# Altium PCB FPv1.3.1.PcbDoc (part 3 of 4)
Units mm, origin at the board's own origin, x right, y up, seen from the top; angles counter-clockwise.
Board outline 81.28 x 53.34 mm, 4 copper layers (Top Layer, GROUND PLANE, POWER PLANE, Bottom Layer); 98 components, 183 nets, 614 pads, 312 vias.
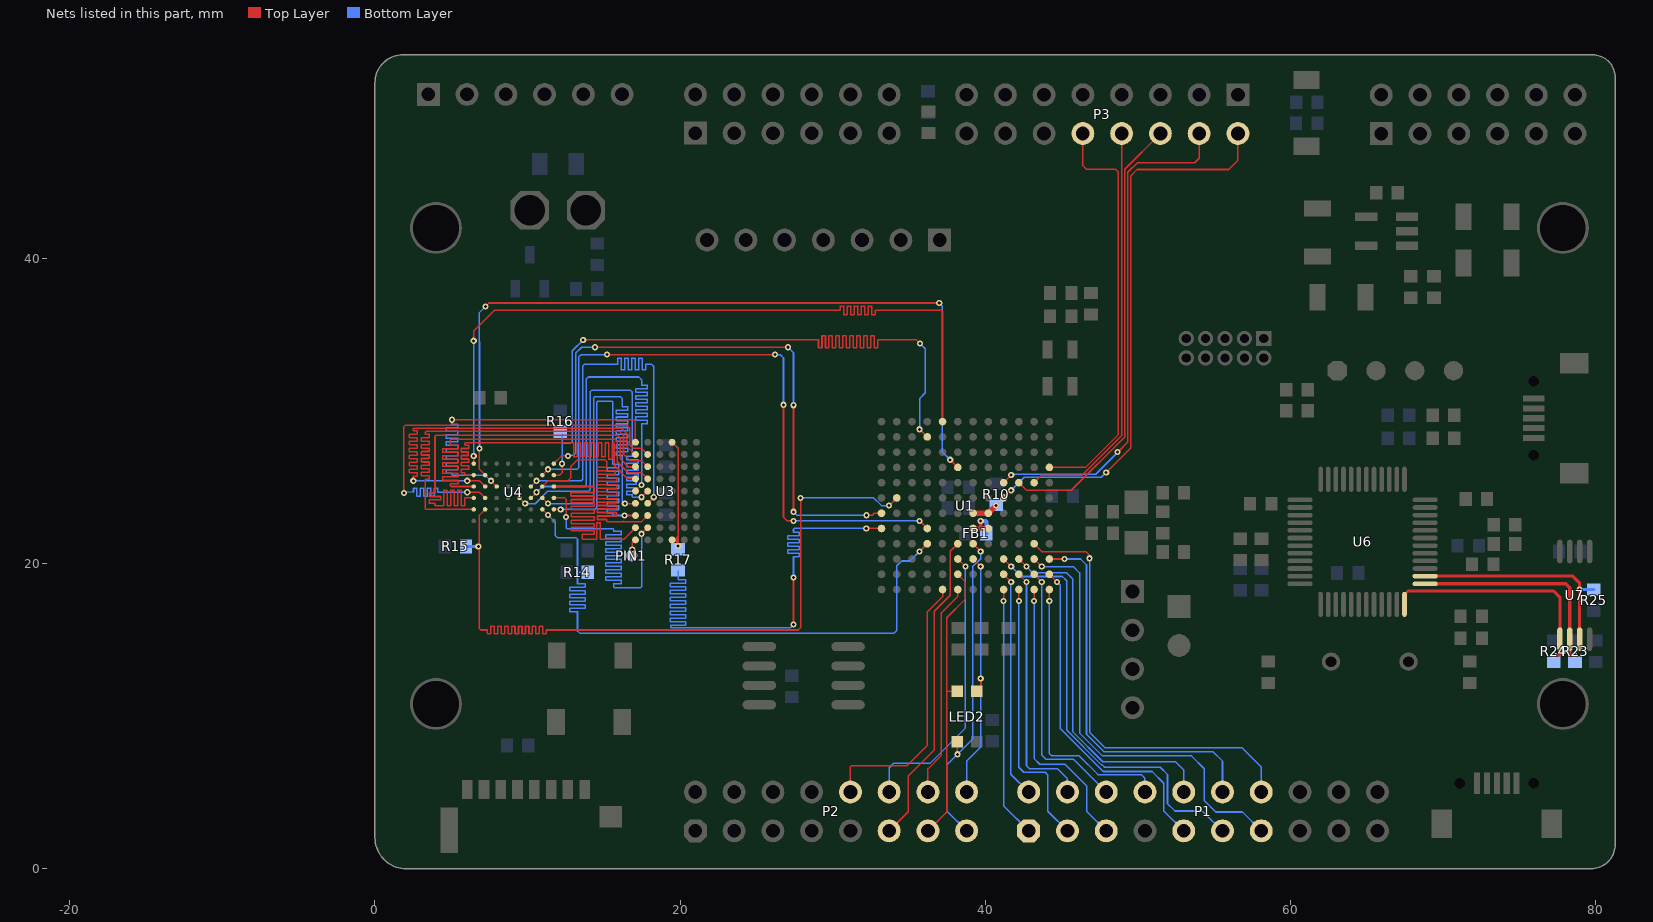
[diagram p5: the nets of this part, all layers, seen from the top]

## Via types
v1: diameter 0.403, hole 0.2, Top Layer to Bottom Layer, tented both sides, 261 vias
v2: diameter 0.503, hole 0.3, Top Layer to Bottom Layer, tented both sides, 25 vias
v3: diameter 0.6, hole 0.4, Top Layer to Bottom Layer, tented both sides, 11 vias
v4: diameter 0.508, hole 0.33, Top Layer to Bottom Layer, tented both sides, 5 vias
v5: diameter 0.703, hole 0.4, Top Layer to Bottom Layer, tented both sides, 3 vias
v6: diameter 0.603, hole 0.4, Top Layer to Bottom Layer, tented both sides, 2 vias
v7: diameter 0.503, hole 0.25, Top Layer to Bottom Layer, tented both sides, 2 vias
v8: diameter 0.6, hole 0.24, Top Layer to Bottom Layer, tented both sides, 1 vias
v9: diameter 0.508, hole 0.349, Top Layer to Bottom Layer, tented both sides, 1 vias
v10: diameter 0.603, hole 0.3, Top Layer to Bottom Layer, tented both sides, 1 vias

## Nets (pads, with @x,y where several pads share a name; then routed paths per layer and width w, separated by ;. In a path a pad name is that pad's centre, name@x,y a point inside that pad or via, vN(x,y) a via of type N, cw(c..) or ccw(c..) an arc to the next point about the centre after c; other vN are vias at no path point) (continued)
AD19: U1.E12 U4.H1 | length 52.7
  Top Layer w0.102: U4.H1@6.475,26.55 v1(6.475,27.05) ; v1@6.488,34.613 6.488,35.262 7.817,36.592 30.493,36.592 30.493,36.86 cw(c30.504,36.86) 30.504,36.872 30.71,36.872 cw(c30.71,36.86) 30.721,36.86 30.721,36.323 ccw(c30.733,36.323) 30.733,36.311 30.938,36.311 ccw(c30.938,36.323) 30.95,36.323 30.95,36.86 cw(c30.961,36.86) 30.961,36.872 31.167,36.872 cw(c31.167,36.86) 31.178,36.86 31.178,36.323 ccw(c31.19,36.323) 31.19,36.311 31.396,36.311 ccw(c31.396,36.323) 31.407,36.323 31.407,36.86 cw(c31.419,36.86) 31.419,36.872 31.624,36.872 cw(c31.624,36.86) 31.636,36.86 31.636,36.323 ccw(c31.647,36.323) 31.647,36.311 31.853,36.311 ccw(c31.853,36.323) 31.864,36.323 31.864,36.86 cw(c31.876,36.86) 31.876,36.872 32.081,36.872 cw(c32.081,36.86) 32.093,36.86 32.093,36.323 ccw(c32.104,36.323) 32.104,36.311 32.31,36.311 ccw(c32.31,36.323) 32.322,36.323 32.322,36.86 cw(c32.333,36.86) 32.333,36.872 32.539,36.872 cw(c32.539,36.86) 32.55,36.86 32.55,36.323 ccw(c32.562,36.323) 32.562,36.311 32.767,36.311 ccw(c32.767,36.323) 32.779,36.323 32.779,36.592 37.145,36.592 37.2,36.536 U1.E12@37.2,29.3
  Bottom Layer w0.102: v1(6.475,27.05) v1(6.475,34.6)
AD20: U1.F9 U4.G2 | length 52.5
  Top Layer w0.102: v1(6.85,27.55) 6.85,26.175 U4.G2@7.225,25.8 ; v1(7.25,36.85) 7.475,37.075 v1@36.982,37.075 ; v1(37.7,26.8) U1.F9@38.2,26.3
  Bottom Layer w0.102: v1(6.85,27.55) 6.85,27.525 6.854,27.529 6.854,34.522 6.85,34.525 6.85,36.45 v1(7.25,36.85) ; v1(36.982,37.084) 37.186,36.881 37.186,27.314 v1(37.7,26.8)
ADDR0: PIN1.1 U3.J1 | length 0.7
  Top Layer w0.102: v1(16.866,20.93) 16.866,21.341 U3.J1@17.075,21.55
ADDR1: U3.H1 U4.A3 | length 30.4
  Top Layer w0.102: U4.A3@11.725,25.05 14.3,25.05 14.362,24.988 14.362,24.68 cw(c14.339,24.68) 14.339,24.657 12.861,24.657 ccw(c12.861,24.634) 12.838,24.634 12.838,24.451 ccw(c12.861,24.451) 12.861,24.429 14.339,24.429 cw(c14.339,24.406) 14.362,24.406 14.362,24.223 cw(c14.339,24.223) 14.339,24.2 12.901,24.2 ccw(c12.901,24.177) 12.878,24.177 12.878,23.994 ccw(c12.901,23.994) 12.901,23.971 14.339,23.971 cw(c14.339,23.948) 14.362,23.948 14.362,23.766 cw(c14.339,23.766) 14.339,23.743 12.901,23.743 ccw(c12.901,23.72) 12.878,23.72 12.878,23.537 ccw(c12.901,23.537) 12.901,23.514 14.339,23.514 cw(c14.339,23.491) 14.362,23.491 14.362,23.308 cw(c14.339,23.308) 14.339,23.286 12.901,23.286 ccw(c12.901,23.263) 12.878,23.263 12.878,23.08 ccw(c12.901,23.08) 12.901,23.057 14.339,23.057 cw(c14.339,23.034) 14.362,23.034 14.362,22.851 cw(c14.339,22.851) 14.339,22.828 12.901,22.828 ccw(c12.901,22.805) 12.878,22.805 12.878,22.623 ccw(c12.901,22.623) 12.901,22.6 14.339,22.6 cw(c14.339,22.577) 14.362,22.577 14.362,22.394 cw(c14.339,22.394) 14.339,22.371 12.901,22.371 ccw(c12.901,22.348) 12.878,22.348 12.878,22.165 ccw(c12.901,22.165) 12.901,22.143 14.339,22.143 cw(c14.339,22.12) 14.362,22.12 14.362,21.937 cw(c14.339,21.937) 14.339,21.914 13.623,21.914 ccw(c13.623,21.891) 13.6,21.891 13.6,21.625 13.625,21.6 14.516,21.6 ccw(c14.516,21.623) 14.539,21.623 14.539,22.663 cw(c14.562,22.663) 14.562,22.686 14.745,22.686 cw(c14.745,22.663) 14.768,22.663 14.768,21.6 16.325,21.6 U3.H1@17.075,22.35
ADDR2: U3.H2 U4.A4 | length 30.5
  Top Layer w0.102: U4.A4@11.725,24.3 12.45,24.3 12.53,24.22 v1@12.53,23.059 ; v1(17.475,21.95) U3.H2@17.875,22.35
  Bottom Layer w0.102: v1(12.525,23.05) 12.525,22.35 12.6,22.275 15.6,22.275 15.65,22.225 15.65,22.134 ccw(c15.673,22.134) 15.673,22.111 16.135,22.111 cw(c16.135,22.088) 16.158,22.088 16.158,21.905 cw(c16.135,21.905) 16.135,21.882 15.165,21.882 ccw(c15.165,21.859) 15.142,21.859 15.142,21.676 ccw(c15.165,21.676) 15.165,21.653 16.135,21.653 cw(c16.135,21.631) 16.158,21.631 16.158,21.448 cw(c16.135,21.448) 16.135,21.425 15.165,21.425 ccw(c15.165,21.402) 15.142,21.402 15.142,21.219 ccw(c15.165,21.219) 15.165,21.196 16.135,21.196 cw(c16.135,21.173) 16.158,21.173 16.158,20.991 cw(c16.135,20.991) 16.135,20.968 15.165,20.968 ccw(c15.165,20.945) 15.142,20.945 15.142,20.762 ccw(c15.165,20.762) 15.165,20.739 16.135,20.739 cw(c16.135,20.716) 16.158,20.716 16.158,20.533 cw(c16.135,20.533) 16.135,20.511 15.165,20.511 ccw(c15.165,20.488) 15.142,20.488 15.142,20.305 ccw(c15.165,20.305) 15.165,20.282 16.135,20.282 cw(c16.135,20.259) 16.158,20.259 16.158,20.076 cw(c16.135,20.076) 16.135,20.053 15.165,20.053 ccw(c15.165,20.03) 15.142,20.03 15.142,19.848 ccw(c15.165,19.848) 15.165,19.825 16.135,19.825 cw(c16.135,19.802) 16.158,19.802 16.158,19.619 cw(c16.135,19.619) 16.135,19.596 15.165,19.596 ccw(c15.165,19.573) 15.142,19.573 15.142,19.39 ccw(c15.165,19.39) 15.165,19.367 16.135,19.367 cw(c16.135,19.345) 16.158,19.345 16.158,19.162 cw(c16.135,19.162) 16.135,19.139 15.165,19.139 ccw(c15.165,19.116) 15.142,19.116 15.142,18.933 ccw(c15.165,18.933) 15.165,18.91 16.135,18.91 cw(c16.135,18.887) 16.158,18.887 16.158,18.705 cw(c16.135,18.705) 16.135,18.682 15.65,18.682 15.65,18.475 15.7,18.425 17.425,18.425 17.475,18.475 v1(17.475,21.95) ; 15.65,18.659 cw(c15.673,18.659) 15.673,18.682
ADDR3: U3.G1 U4.A5 | length 30.1
  Top Layer w0.102: U4.A5@11.725,23.55 v1(12.175,23.55) ; v1(16.35,23.15) U3.G1@17.075,23.15
  Bottom Layer w0.102: v1(12.175,23.55) 14.425,23.55 14.531,23.656 14.531,30.559 14.605,30.632 15.545,30.632 15.599,30.578 15.599,26.539 ccw(c15.622,26.539) 15.622,26.516 15.957,26.516 cw(c15.957,26.493) 15.98,26.493 15.98,26.31 cw(c15.957,26.31) 15.957,26.287 15.241,26.287 ccw(c15.241,26.264) 15.218,26.264 15.218,26.081 ccw(c15.241,26.081) 15.241,26.058 15.957,26.058 cw(c15.957,26.036) 15.98,26.036 15.98,25.853 cw(c15.957,25.853) 15.957,25.83 15.241,25.83 ccw(c15.241,25.807) 15.218,25.807 15.218,25.624 ccw(c15.241,25.624) 15.241,25.601 15.957,25.601 cw(c15.957,25.578) 15.98,25.578 15.98,25.396 cw(c15.957,25.396) 15.957,25.373 15.241,25.373 ccw(c15.241,25.35) 15.218,25.35 15.218,25.167 ccw(c15.241,25.167) 15.241,25.144 15.957,25.144 cw(c15.957,25.121) 15.98,25.121 15.98,24.938 cw(c15.957,24.938) 15.957,24.915 15.241,24.915 ccw(c15.241,24.893) 15.218,24.893 15.218,24.71 ccw(c15.241,24.71) 15.241,24.687 15.957,24.687 cw(c15.957,24.664) 15.98,24.664 15.98,24.481 cw(c15.957,24.481) 15.957,24.458 15.241,24.458 ccw(c15.241,24.435) 15.218,24.435 15.218,24.253 ccw(c15.241,24.253) 15.241,24.23 15.957,24.23 cw(c15.957,24.207) 15.98,24.207 15.98,24.024 cw(c15.957,24.024) 15.957,24.001 15.241,24.001 ccw(c15.241,23.978) 15.218,23.978 15.218,23.795 ccw(c15.241,23.795) 15.241,23.772 15.957,23.772 cw(c15.957,23.75) 15.98,23.75 15.98,23.567 cw(c15.957,23.567) 15.957,23.544 15.241,23.544 ccw(c15.241,23.521) 15.218,23.521 15.218,23.338 ccw(c15.241,23.338) 15.241,23.315 15.576,23.315 cw(c15.576,23.292) 15.599,23.292 15.599,23.201 15.65,23.15 v1(16.35,23.15)
ADDR4: U3.G2 U4.B3 | length 30.8
  Top Layer w0.102: U4.B3@10.975,25.05 11.35,25.425 12.65,25.425 12.825,25.6 12.825,26.35 13.275,26.8 15.085,26.8 15.2,26.685 15.2,26.341 cw(c15.177,26.341) 15.177,26.318 14.588,26.318 ccw(c14.588,26.295) 14.565,26.295 14.565,26.113 ccw(c14.588,26.113) 14.588,26.09 15.739,26.09 cw(c15.739,26.067) 15.761,26.067 15.761,25.884 cw(c15.739,25.884) 15.739,25.861 14.588,25.861 ccw(c14.588,25.838) 14.565,25.838 14.565,25.655 ccw(c14.588,25.655) 14.588,25.633 15.812,25.633 cw(c15.812,25.61) 15.835,25.61 15.835,25.427 cw(c15.812,25.427) 15.812,25.404 14.588,25.404 ccw(c14.588,25.381) 14.565,25.381 14.565,25.198 ccw(c14.588,25.198) 14.588,25.175 15.812,25.175 cw(c15.812,25.152) 15.835,25.152 15.835,24.97 cw(c15.812,24.97) 15.812,24.947 14.588,24.947 ccw(c14.588,24.924) 14.565,24.924 14.565,24.741 ccw(c14.588,24.741) 14.588,24.718 15.812,24.718 cw(c15.812,24.695) 15.835,24.695 15.835,24.512 cw(c15.812,24.512) 15.812,24.49 14.588,24.49 ccw(c14.588,24.467) 14.565,24.467 14.565,24.284 ccw(c14.588,24.284) 14.588,24.261 15.812,24.261 cw(c15.812,24.238) 15.835,24.238 15.835,24.055 cw(c15.812,24.055) 15.812,24.032 14.588,24.032 ccw(c14.588,24.009) 14.565,24.009 14.565,23.827 ccw(c14.588,23.827) 14.588,23.804 15.812,23.804 cw(c15.812,23.781) 15.835,23.781 15.835,23.598 cw(c15.812,23.598) 15.812,23.575 14.588,23.575 ccw(c14.588,23.552) 14.565,23.552 14.565,23.369 ccw(c14.588,23.369) 14.588,23.347 15.812,23.347 cw(c15.812,23.324) 15.835,23.324 15.835,23.141 cw(c15.812,23.141) 15.812,23.118 14.588,23.118 ccw(c14.588,23.095) 14.565,23.095 14.565,22.912 ccw(c14.588,22.912) 14.588,22.889 15.177,22.889 cw(c15.177,22.866) 15.2,22.866 15.2,22.775 15.225,22.75 16.3,22.75 ; 16.292,22.758 16.3,22.75 ; U3.G2@17.875,23.15 17.475,22.75 16.3,22.75
ADDR5: U3.F1 U4.B4 | length 30.4
  Top Layer w0.102: U4.B4@10.975,24.3 v1(11.35,23.925) ; v1@16.375,23.922 17.047,23.922 U3.F1@17.075,23.95
  Bottom Layer w0.102: v1(11.35,23.925) 14.275,23.925 14.328,23.978 14.328,30.85 14.403,30.925 16.1,30.925 16.2,30.825 16.2,30.475 16.2,30.313 ccw(c16.223,30.313) 16.223,30.29 16.558,30.29 cw(c16.558,30.267) 16.581,30.267 16.581,30.084 cw(c16.558,30.084) 16.558,30.061 16.2,30.061 15.842,30.061 ccw(c15.842,30.038) 15.819,30.038 15.819,29.855 ccw(c15.842,29.855) 15.842,29.833 16.2,29.833 16.558,29.833 cw(c16.558,29.81) 16.581,29.81 16.581,29.627 cw(c16.558,29.627) 16.558,29.604 16.2,29.604 15.842,29.604 ccw(c15.842,29.581) 15.819,29.581 15.819,29.398 ccw(c15.842,29.398) 15.842,29.375 16.2,29.375 16.558,29.375 cw(c16.558,29.352) 16.581,29.352 16.581,29.17 cw(c16.558,29.17) 16.558,29.147 16.2,29.147 15.842,29.147 ccw(c15.842,29.124) 15.819,29.124 15.819,28.941 ccw(c15.842,28.941) 15.842,28.918 16.2,28.918 16.558,28.918 cw(c16.558,28.895) 16.581,28.895 16.581,28.712 cw(c16.558,28.712) 16.558,28.69 16.2,28.69 15.842,28.69 ccw(c15.842,28.667) 15.819,28.667 15.819,28.484 ccw(c15.842,28.484) 15.842,28.461 16.2,28.461 16.558,28.461 cw(c16.558,28.438) 16.581,28.438 16.581,28.255 cw(c16.558,28.255) 16.558,28.232 16.2,28.232 15.842,28.232 ccw(c15.842,28.209) 15.819,28.209 15.819,28.027 ccw(c15.842,28.027) 15.842,28.004 16.2,28.004 16.558,28.004 cw(c16.558,27.981) 16.581,27.981 16.581,27.798 cw(c16.558,27.798) 16.558,27.775 16.2,27.775 15.842,27.775 ccw(c15.842,27.752) 15.819,27.752 15.819,27.569 ccw(c15.842,27.569) 15.842,27.547 16.2,27.547 16.558,27.547 cw(c16.558,27.524) 16.581,27.524 16.581,27.341 cw(c16.558,27.341) 16.558,27.318 16.2,27.318 15.842,27.318 ccw(c15.842,27.295) 15.819,27.295 15.819,27.112 ccw(c15.842,27.112) 15.842,27.089 16.177,27.089 cw(c16.177,27.066) 16.2,27.066 16.2,26.975 16.2,24.1 v1(16.375,23.925)
ADDR6: U3.F2 U4.C3 | length 30.9
  Top Layer w0.102: U4.C3@10.225,25.05 v1(10.6,25.425) ; U3.F2@17.875,23.95 v1(18.275,24.35)
  Bottom Layer w0.102: v1(10.6,25.425) 13.525,25.425 13.625,25.525 13.625,32.95 13.75,33.075 15.8,33.075 15.891,33.075 ccw(c15.891,33.098) 15.914,33.098 15.914,33.433 cw(c15.937,33.433) 15.937,33.456 16.12,33.456 cw(c16.12,33.433) 16.143,33.433 16.143,33.075 16.143,32.717 ccw(c16.166,32.717) 16.166,32.694 16.349,32.694 ccw(c16.349,32.717) 16.372,32.717 16.372,33.075 16.372,33.433 cw(c16.394,33.433) 16.394,33.456 16.577,33.456 cw(c16.577,33.433) 16.6,33.433 16.6,33.075 16.6,32.717 ccw(c16.623,32.717) 16.623,32.694 16.806,32.694 ccw(c16.806,32.717) 16.829,32.717 16.829,33.075 16.829,33.433 cw(c16.852,33.433) 16.852,33.456 17.034,33.456 cw(c17.034,33.433) 17.057,33.433 17.057,33.075 17.057,32.717 ccw(c17.08,32.717) 17.08,32.694 17.263,32.694 ccw(c17.263,32.717) 17.286,32.717 17.286,33.075 17.286,33.433 cw(c17.309,33.433) 17.309,33.456 17.492,33.456 cw(c17.492,33.433) 17.515,33.433 17.515,33.075 17.515,32.717 ccw(c17.537,32.717) 17.537,32.694 17.72,32.694 ccw(c17.72,32.717) 17.743,32.717 17.743,33.075 17.75,33.075 18.125,33.075 18.275,32.925 v1(18.275,24.35)
ADDR7: U3.E1 U4.C4 | length 30.3
  Top Layer w0.102: U4.C4@10.225,24.3 v1(10.6,24.675) ; U3.E1@17.075,24.75 v1(17.475,25.15)
  Bottom Layer w0.102: v1(10.6,24.675) 10.975,25.05 13.775,25.05 13.85,25.125 13.85,32.1 13.975,32.225 17.3,32.225 17.475,32.05 17.475,31.8 17.475,31.709 ccw(c17.498,31.709) 17.498,31.686 17.833,31.686 cw(c17.833,31.663) 17.856,31.663 17.856,31.48 cw(c17.833,31.48) 17.833,31.457 17.475,31.457 17.117,31.457 ccw(c17.117,31.434) 17.094,31.434 17.094,31.251 ccw(c17.117,31.251) 17.117,31.228 17.475,31.228 17.833,31.228 cw(c17.833,31.206) 17.856,31.206 17.856,31.023 cw(c17.833,31.023) 17.833,31 17.475,31 17.117,31 ccw(c17.117,30.977) 17.094,30.977 17.094,30.794 ccw(c17.117,30.794) 17.117,30.771 17.475,30.771 17.833,30.771 cw(c17.833,30.748) 17.856,30.748 17.856,30.566 cw(c17.833,30.566) 17.833,30.543 17.475,30.543 17.117,30.543 ccw(c17.117,30.52) 17.094,30.52 17.094,30.337 ccw(c17.117,30.337) 17.117,30.314 17.475,30.314 17.833,30.314 cw(c17.833,30.291) 17.856,30.291 17.856,30.108 cw(c17.833,30.108) 17.833,30.085 17.475,30.085 17.117,30.085 ccw(c17.117,30.063) 17.094,30.063 17.094,29.88 ccw(c17.117,29.88) 17.117,29.857 17.475,29.857 17.833,29.857 cw(c17.833,29.834) 17.856,29.834 17.856,29.651 cw(c17.833,29.651) 17.833,29.628 17.475,29.628 17.117,29.628 ccw(c17.117,29.605) 17.094,29.605 17.094,29.423 ccw(c17.117,29.423) 17.117,29.4 17.475,29.4 17.833,29.4 cw(c17.833,29.377) 17.856,29.377 17.856,29.194 cw(c17.833,29.194) 17.833,29.171 17.498,29.171 ccw(c17.498,29.148) 17.475,29.148 17.475,29.025 v1(17.475,25.15)
ADDR8: U3.E2 U4.D4 | length 30.2
  Top Layer w0.102: U4.D4@9.475,24.3 v1(9.85,23.925) ; v1(17.475,24.35) U3.E2@17.875,24.75
  Bottom Layer w0.102: v1(9.85,23.925) 10.5,23.925 11.3,24.725 13.975,24.725 14.125,24.875 14.125,31.275 14.2,31.35 16.75,31.35 16.872,31.228 16.872,27.2 16.872,27.055 cw(c16.849,27.055) 16.849,27.032 16.514,27.032 ccw(c16.514,27.009) 16.491,27.009 16.491,26.826 ccw(c16.514,26.826) 16.514,26.803 16.872,26.803 17.23,26.803 cw(c17.23,26.78) 17.253,26.78 17.253,26.597 cw(c17.23,26.597) 17.23,26.575 16.872,26.575 16.514,26.575 ccw(c16.514,26.552) 16.491,26.552 16.491,26.369 ccw(c16.514,26.369) 16.514,26.346 16.872,26.346 17.23,26.346 cw(c17.23,26.323) 17.253,26.323 17.253,26.14 cw(c17.23,26.14) 17.23,26.117 16.872,26.117 16.514,26.117 ccw(c16.514,26.094) 16.491,26.094 16.491,25.912 ccw(c16.514,25.912) 16.514,25.889 16.872,25.889 17.23,25.889 cw(c17.23,25.866) 17.253,25.866 17.253,25.683 cw(c17.23,25.683) 17.23,25.66 16.872,25.66 16.514,25.66 ccw(c16.514,25.637) 16.491,25.637 16.491,25.454 ccw(c16.514,25.454) 16.514,25.432 16.872,25.432 17.106,25.432 cw(c17.106,25.409) 17.129,25.409 17.129,25.226 cw(c17.106,25.226) 17.106,25.203 16.872,25.203 16.514,25.203 ccw(c16.514,25.18) 16.491,25.18 16.491,24.997 ccw(c16.514,24.997) 16.514,24.974 16.872,24.974 17.155,24.974 cw(c17.155,24.951) 17.178,24.951 17.178,24.769 cw(c17.155,24.769) 17.155,24.746 16.872,24.746 16.514,24.746 ccw(c16.514,24.723) 16.491,24.723 16.491,24.54 ccw(c16.514,24.54) 16.514,24.517 16.849,24.517 cw(c16.849,24.494) 16.872,24.494 16.872,24.403 16.925,24.35 v1(17.475,24.35)
ADDR9: U3.D1 U4.H2 | length 30.4
  Top Layer w0.102: U4.H2@6.475,25.8 5.925,25.8 5.9,25.825 5.9,25.916 ccw(c5.877,25.916) 5.877,25.939 5.669,25.939 cw(c5.669,25.962) 5.646,25.962 5.646,26.145 cw(c5.669,26.145) 5.669,26.168 6.131,26.168 ccw(c6.131,26.191) 6.154,26.191 6.154,26.374 ccw(c6.131,26.374) 6.131,26.397 5.669,26.397 cw(c5.669,26.419) 5.646,26.419 5.646,26.602 cw(c5.669,26.602) 5.669,26.625 6.131,26.625 ccw(c6.131,26.648) 6.154,26.648 6.154,26.831 ccw(c6.131,26.831) 6.131,26.854 5.669,26.854 cw(c5.669,26.877) 5.646,26.877 5.646,27.059 cw(c5.669,27.059) 5.669,27.082 6.102,27.082 ccw(c6.102,27.105) 6.125,27.105 6.125,27.288 ccw(c6.102,27.288) 6.102,27.311 5.669,27.311 cw(c5.669,27.334) 5.646,27.334 5.646,27.517 cw(c5.669,27.517) 5.669,27.54 6.131,27.54 ccw(c6.131,27.562) 6.154,27.562 6.154,27.745 ccw(c6.131,27.745) 6.131,27.768 5.923,27.768 cw(c5.923,27.791) 5.9,27.791 5.9,27.875 5.929,27.904 12.878,27.904 13.005,27.904 cw(c13.005,27.881) 13.028,27.881 13.028,27.022 ccw(c13.051,27.022) 13.051,26.999 13.234,26.999 ccw(c13.234,27.022) 13.257,27.022 13.257,27.881 cw(c13.28,27.881) 13.28,27.904 13.463,27.904 cw(c13.463,27.881) 13.485,27.881 13.485,27.026 ccw(c13.508,27.026) 13.508,27.003 13.691,27.003 ccw(c13.691,27.026) 13.714,27.026 13.714,27.881 cw(c13.737,27.881) 13.737,27.904 13.92,27.904 cw(c13.92,27.881) 13.943,27.881 13.943,27.026 ccw(c13.965,27.026) 13.965,27.003 14.148,27.003 ccw(c14.148,27.026) 14.171,27.026 14.171,27.881 cw(c14.194,27.881) 14.194,27.904 14.377,27.904 cw(c14.377,27.881) 14.4,27.881 14.4,27.026 ccw(c14.423,27.026) 14.423,27.003 14.606,27.003 ccw(c14.606,27.026) 14.628,27.026 14.628,27.881 cw(c14.651,27.881) 14.651,27.904 14.834,27.904 cw(c14.834,27.881) 14.857,27.881 14.857,27.026 ccw(c14.88,27.026) 14.88,27.003 15.063,27.003 ccw(c15.063,27.026) 15.086,27.026 15.086,27.881 cw(c15.108,27.881) 15.108,27.904 15.291,27.904 cw(c15.291,27.881) 15.314,27.881 15.314,26.867 ccw(c15.337,26.867) 15.337,26.844 15.52,26.844 ccw(c15.52,26.867) 15.543,26.867 15.543,27.881 cw(c15.566,27.881) 15.566,27.904 15.657,27.904 15.682,27.879 15.682,26.443 16.575,25.55 U3.D1@17.075,25.55
ADDR10: U3.D2 U4.H3 | length 30.2
  Top Layer w0.102: U4.H3@6.475,25.05 4.998,25.05 4.948,25.101 4.948,25.212 cw(c4.97,25.212) 4.97,25.235 5.433,25.235 ccw(c5.433,25.258) 5.456,25.258 5.456,25.441 ccw(c5.433,25.441) 5.433,25.463 4.462,25.463 cw(c4.462,25.486) 4.44,25.486 4.44,25.669 cw(c4.462,25.669) 4.462,25.692 5.428,25.692 ccw(c5.428,25.715) 5.451,25.715 5.451,25.898 ccw(c5.428,25.898) 5.428,25.921 4.462,25.921 cw(c4.462,25.944) 4.44,25.944 4.44,26.126 cw(c4.462,26.126) 4.462,26.149 5.421,26.149 ccw(c5.421,26.172) 5.444,26.172 5.444,26.355 ccw(c5.421,26.355) 5.421,26.378 4.462,26.378 cw(c4.462,26.401) 4.44,26.401 4.44,26.584 cw(c4.462,26.584) 4.462,26.607 5.421,26.607 ccw(c5.421,26.629) 5.444,26.629 5.444,26.812 ccw(c5.421,26.812) 5.421,26.835 4.462,26.835 cw(c4.462,26.858) 4.44,26.858 4.44,27.041 cw(c4.462,27.041) 4.462,27.064 5.421,27.064 ccw(c5.421,27.087) 5.444,27.087 5.444,27.269 ccw(c5.421,27.269) 5.421,27.292 4.462,27.292 cw(c4.462,27.315) 4.44,27.315 4.44,27.498 cw(c4.462,27.498) 4.462,27.521 5.421,27.521 ccw(c5.421,27.544) 5.444,27.544 5.444,27.727 ccw(c5.421,27.727) 5.421,27.749 4.97,27.749 cw(c4.97,27.772) 4.948,27.772 4.948,28.112 4.982,28.146 15.77,28.146 15.885,28.032 15.885,26.665 16.6,25.95 17.475,25.95 U3.D2@17.875,25.55
ADDR11: U3.C1 U4.H4 | length 30.6
  Top Layer w0.102: U4.H4@6.475,24.3 5.903,24.3 ccw(c5.903,24.277) 5.88,24.277 5.88,23.815 cw(c5.857,23.815) 5.857,23.792 5.674,23.792 cw(c5.674,23.815) 5.651,23.815 5.651,24.785 ccw(c5.629,24.785) 5.629,24.808 5.446,24.808 ccw(c5.446,24.785) 5.423,24.785 5.423,23.815 cw(c5.4,23.815) 5.4,23.792 5.217,23.792 cw(c5.217,23.815) 5.194,23.815 5.194,24.785 ccw(c5.171,24.785) 5.171,24.808 4.989,24.808 ccw(c4.989,24.785) 4.966,24.785 4.966,23.815 cw(c4.943,23.815) 4.943,23.792 4.76,23.792 cw(c4.76,23.815) 4.737,23.815 4.737,24.785 ccw(c4.714,24.785) 4.714,24.808 4.531,24.808 ccw(c4.531,24.785) 4.508,24.785 4.508,23.815 cw(c4.486,23.815) 4.486,23.792 3.97,23.792 3.937,23.825 3.937,23.917 ccw(c3.914,23.917) 3.914,23.939 3.579,23.939 cw(c3.579,23.962) 3.556,23.962 3.556,24.145 cw(c3.579,24.145) 3.579,24.168 3.937,24.168 4.295,24.168 ccw(c4.295,24.191) 4.318,24.191 4.318,24.374 ccw(c4.295,24.374) 4.295,24.397 3.937,24.397 3.579,24.397 cw(c3.579,24.42) 3.556,24.42 3.556,24.602 cw(c3.579,24.602) 3.579,24.625 3.937,24.625 3.937,24.638 3.937,28.346 3.999,28.408 15.915,28.408 16.088,28.235 16.088,26.862 16.6,26.35 U3.C1@17.075,26.35
ADDR12: U3.C2 U4.H5 | length 30.8
  Top Layer w0.102: U4.H5@6.475,23.55 3.348,23.55 3.302,23.596 3.302,25.425 3.302,25.491 cw(c3.325,25.491) 3.325,25.514 3.533,25.514 ccw(c3.533,25.537) 3.556,25.537 3.556,25.72 ccw(c3.533,25.72) 3.533,25.743 3.302,25.743 3.071,25.743 cw(c3.071,25.766) 3.048,25.766 3.048,25.949 cw(c3.071,25.949) 3.071,25.971 3.302,25.971 3.533,25.971 ccw(c3.533,25.994) 3.556,25.994 3.556,26.177 ccw(c3.533,26.177) 3.533,26.2 3.302,26.2 3.071,26.2 cw(c3.071,26.223) 3.048,26.223 3.048,26.406 cw(c3.071,26.406) 3.071,26.429 3.302,26.429 3.533,26.429 ccw(c3.533,26.452) 3.556,26.452 3.556,26.634 ccw(c3.533,26.634) 3.533,26.657 3.302,26.657 3.071,26.657 cw(c3.071,26.68) 3.048,26.68 3.048,26.863 cw(c3.071,26.863) 3.071,26.886 3.302,26.886 3.533,26.886 ccw(c3.533,26.909) 3.556,26.909 3.556,27.092 ccw(c3.533,27.092) 3.533,27.114 3.302,27.114 3.071,27.114 cw(c3.071,27.137) 3.048,27.137 3.048,27.32 cw(c3.071,27.32) 3.071,27.343 3.302,27.343 3.533,27.343 ccw(c3.533,27.366) 3.556,27.366 3.556,27.549 ccw(c3.533,27.549) 3.533,27.572 3.302,27.572 3.071,27.572 cw(c3.071,27.595) 3.048,27.595 3.048,27.777 cw(c3.071,27.777) 3.071,27.8 3.302,27.8 3.533,27.8 ccw(c3.533,27.823) 3.556,27.823 3.556,28.006 ccw(c3.533,28.006) 3.533,28.029 3.302,28.029 3.071,28.029 cw(c3.071,28.052) 3.048,28.052 3.048,28.235 cw(c3.071,28.235) 3.071,28.258 3.302,28.258 3.533,28.258 ccw(c3.533,28.28) 3.556,28.28 3.556,28.463 ccw(c3.533,28.463) 3.533,28.486 3.325,28.486 cw(c3.325,28.509) 3.302,28.509 3.302,28.6 3.364,28.662 16.035,28.662 16.291,28.406 16.291,27.168 16.709,26.75 17.475,26.75 U3.C2@17.875,26.35
ADDR13: U3.B1 U4.G3 | length 30.4
  Top Layer w0.102: v1(2.515,25.425) 2.515,25.705 2.515,25.711 cw(c2.537,25.711) 2.537,25.734 2.746,25.734 ccw(c2.746,25.757) 2.769,25.757 2.769,25.94 ccw(c2.746,25.94) 2.746,25.963 2.515,25.963 2.283,25.963 cw(c2.283,25.986) 2.261,25.986 2.261,26.169 cw(c2.283,26.169) 2.283,26.191 2.515,26.191 2.746,26.191 ccw(c2.746,26.214) 2.769,26.214 2.769,26.397 ccw(c2.746,26.397) 2.746,26.42 2.515,26.42 2.283,26.42 cw(c2.283,26.443) 2.261,26.443 2.261,26.626 cw(c2.283,26.626) 2.283,26.649 2.515,26.649 2.746,26.649 ccw(c2.746,26.672) 2.769,26.672 2.769,26.854 ccw(c2.746,26.854) 2.746,26.877 2.515,26.877 2.283,26.877 cw(c2.283,26.9) 2.261,26.9 2.261,27.083 cw(c2.283,27.083) 2.283,27.106 2.515,27.106 2.746,27.106 ccw(c2.746,27.129) 2.769,27.129 2.769,27.312 ccw(c2.746,27.312) 2.746,27.334 2.515,27.334 2.283,27.334 cw(c2.283,27.357) 2.261,27.357 2.261,27.54 cw(c2.283,27.54) 2.283,27.563 2.515,27.563 2.746,27.563 ccw(c2.746,27.586) 2.769,27.586 2.769,27.769 ccw(c2.746,27.769) 2.746,27.792 2.515,27.792 2.283,27.792 cw(c2.283,27.815) 2.261,27.815 2.261,27.997 cw(c2.283,27.997) 2.283,28.02 2.515,28.02 2.746,28.02 ccw(c2.746,28.043) 2.769,28.043 2.769,28.226 ccw(c2.746,28.226) 2.746,28.249 2.515,28.249 2.283,28.249 cw(c2.283,28.272) 2.261,28.272 2.261,28.455 cw(c2.283,28.455) 2.283,28.477 2.515,28.477 2.746,28.477 ccw(c2.746,28.5) 2.769,28.5 2.769,28.683 ccw(c2.746,28.683) 2.746,28.706 2.537,28.706 cw(c2.537,28.729) 2.515,28.729 2.515,28.82 2.562,28.868 16.166,28.868 16.494,28.54 16.494,27.71 17.054,27.15 U3.B1@17.075,27.15 ; v1(6.05,25.425) 6.85,25.425 U4.G3@7.225,25.05
  Bottom Layer w0.102: v1(2.515,25.425) v1(6.05,25.425)
ADDR14: U3.B2 U4.G4 | length 30.6
  Top Layer w0.102: v1(1.9,24.625) 1.9,28.975 1.996,29.071 16.496,29.071 16.698,28.87 16.698,27.794 16.941,27.55 17.475,27.55 U3.B2@17.875,27.15 ; v1(6.05,24.675) 6.85,24.675 U4.G4@7.225,24.3
  Bottom Layer w0.102: v1@1.95,24.675 2.527,24.698 ; 2.504,24.675 ccw(c2.504,24.698) 2.527,24.698 ; v1(6.05,24.675) 4.15,24.675 cw(c4.15,24.698) 4.127,24.698 4.127,24.906 ccw(c4.105,24.906) 4.105,24.929 3.922,24.929 ccw(c3.922,24.906) 3.899,24.906 3.899,24.444 cw(c3.876,24.444) 3.876,24.421 3.693,24.421 cw(c3.693,24.444) 3.67,24.444 3.67,24.906 ccw(c3.647,24.906) 3.647,24.929 3.465,24.929 ccw(c3.465,24.906) 3.442,24.906 3.442,24.444 cw(c3.419,24.444) 3.419,24.421 3.236,24.421 cw(c3.236,24.444) 3.213,24.444 3.213,24.906 ccw(c3.19,24.906) 3.19,24.929 3.007,24.929 ccw(c3.007,24.906) 2.984,24.906 2.984,24.444 cw(c2.962,24.444) 2.962,24.421 2.779,24.421 cw(c2.779,24.444) 2.756,24.444 2.756,24.906 ccw(c2.733,24.906) 2.733,24.929 2.55,24.929 ccw(c2.55,24.906) 2.527,24.906 2.527,24.698
ADDR15: U3.A1 U4.F3 | length 30.7
  Top Layer w0.102: v1(7.6,25.425) U4.F3@7.975,25.05 ; U3.A1@17.075,27.95 17.075,29.325 16.976,29.424 v1@5.049,29.424 ; v1@5.049,29.424 v1(5.05,29.425)
  Bottom Layer w0.102: v1(5.05,29.425) 5.05,29.149 ccw(c5.073,29.149) 5.073,29.126 5.408,29.126 cw(c5.408,29.103) 5.431,29.103 5.431,28.92 cw(c5.408,28.92) 5.408,28.897 4.692,28.897 ccw(c4.692,28.874) 4.669,28.874 4.669,28.691 ccw(c4.692,28.691) 4.692,28.668 5.408,28.668 cw(c5.408,28.646) 5.431,28.646 5.431,28.463 cw(c5.408,28.463) 5.408,28.44 4.692,28.44 ccw(c4.692,28.417) 4.669,28.417 4.669,28.234 ccw(c4.692,28.234) 4.692,28.211 5.408,28.211 cw(c5.408,28.188) 5.431,28.188 5.431,28.006 cw(c5.408,28.006) 5.408,27.983 4.692,27.983 ccw(c4.692,27.96) 4.669,27.96 4.669,27.777 ccw(c4.692,27.777) 4.692,27.754 5.408,27.754 cw(c5.408,27.731) 5.431,27.731 5.431,27.548 cw(c5.408,27.548) 5.408,27.525 4.692,27.525 ccw(c4.692,27.503) 4.669,27.503 4.669,27.32 ccw(c4.692,27.32) 4.692,27.297 5.408,27.297 cw(c5.408,27.274) 5.431,27.274 5.431,27.091 cw(c5.408,27.091) 5.408,27.068 4.692,27.068 ccw(c4.692,27.045) 4.669,27.045 4.669,26.863 ccw(c4.692,26.863) 4.692,26.84 5.408,26.84 cw(c5.408,26.817) 5.431,26.817 5.431,26.634 cw(c5.408,26.634) 5.408,26.611 4.692,26.611 ccw(c4.692,26.588) 4.669,26.588 4.669,26.405 ccw(c4.692,26.405) 4.692,26.382 5.408,26.382 cw(c5.408,26.36) 5.431,26.36 5.431,26.177 cw(c5.408,26.177) 5.408,26.154 4.692,26.154 ccw(c4.692,26.131) 4.669,26.131 4.669,25.948 ccw(c4.692,25.948) 4.692,25.925 5.027,25.925 cw(c5.027,25.902) 5.05,25.902 5.05,25.811 5.082,25.779 7.246,25.779 v1(7.6,25.425)
AGND: R10.2 U1.G6 U1.H6 | length 1.7
  Top Layer w0.381: U1.G6@39.2,23.3 U1.H6@40.2,23.3 v1(40.7,23.8)
ALE: R17.2 U3.A4 U3.J4 | length 9.1
  Top Layer w0.102: U3.J4@19.475,21.55 U3.J4@19.65,21.55 ; U3.A4@19.475,27.95 19.875,27.55 19.875,27.3 19.875,21.775 ; U3.J4@19.65,21.55 19.763,21.663 ; U3.J4@19.65,21.55 19.85,21.55 ; U3.J4@19.65,21.55 19.75,21.45 ; 19.75,21.45 19.85,21.55 ; 19.75,21.45 19.85,21.35 ; 19.763,21.663 19.763,21.637 19.85,21.55 ; 19.763,21.663 19.85,21.75 ; 19.85,21.35 19.85,21.175 v1(19.875,21.15) ; 19.85,21.35 19.85,21.55 ; 19.85,21.35 19.875,21.325 v1(19.875,21.15) ; 19.85,21.55 19.85,21.75 ; 19.85,21.75 19.875,21.775 ; v1(19.875,21.15) 19.875,21.775
ANALOG1: P1.1 U1.J1 | length 16.5
  Top Layer w0.102: v1(41.2,17.551) U1.J1@41.2,18.3
  Bottom Layer w0.102: v1(41.2,17.551) 41.2,4.13 P1.1@42.845,2.485
ANALOG2: P1.2 U1.J2 | length 15
  Top Layer w0.102: U1.J2@41.2,19.3 v1(41.7,18.8)
  Bottom Layer w0.102: v1@41.675,18.825 41.675,6.195 P1.2@42.845,5.025
ANALOG3: P1.3 U1.K1 | length 18
  Top Layer w0.102: v1(42.2,17.551) U1.K1@42.2,18.3
  Bottom Layer w0.102: v1(42.2,17.551) 42.2,6.65 42.525,6.325 43.925,6.325 44.1,6.15 44.1,3.77 P1.3@45.385,2.485
ANALOG4: P1.4 U1.K2 | length 16.7
  Top Layer w0.102: U1.K2@42.2,19.3 v1(42.7,18.8)
  Bottom Layer w0.102: v1(42.7,18.8) 42.7,6.75 42.903,6.547 44.728,6.547 45.385,5.89 P1.4@45.385,5.025
ANALOG5: P1.5 U1.L1 | length 18.7
  Top Layer w0.102: v1(43.2,17.551) U1.L1@43.2,18.3
  Bottom Layer w0.102: v1(43.2,17.551) 43.2,7.225 43.575,6.85 45.225,6.85 46.65,5.425 46.65,3.76 P1.5@47.925,2.485
ANALOG6: P1.6 U1.L2 | length 17.3
  Top Layer w0.102: U1.L2@43.2,19.3 v1(43.7,18.8)
  Bottom Layer w0.102: v1(43.7,18.8) 43.7,7.45 43.975,7.175 45.775,7.175 P1.6@47.925,5.025
ANALOG7: P1.8 U1.M1 | length 18.6
  Top Layer w0.102: v1@44.2,17.555 U1.M1@44.2,18.3
  Bottom Layer w0.102: v1@44.2,17.551 44.2,7.55 44.35,7.4 46.15,7.4 47.379,6.171 50.229,6.171 50.465,5.935 P1.8@50.465,5.025
  other v1: 44.196,17.551
ANALOG8: P1.9 U1.M2 | length 22.3
  Top Layer w0.102: U1.M2@44.2,19.3 v1(44.7,18.8)
  Bottom Layer w0.102: v1(44.7,18.8) 44.925,18.575 44.925,9.175 47.726,6.374 50.928,6.374 51.7,5.602 51.7,3.79 P1.9@53.005,2.485
ANALOG9: P1.10 U1.K3 | length 23.8
  Top Layer w0.102: U1.K3@42.2,20.3 v1(42.7,19.8)
  Bottom Layer w0.102: v1(42.7,19.8) 43.094,19.406 45.319,19.406 45.745,18.98 45.745,8.966 47.701,7.01 52.465,7.01 53.005,6.47 P1.10@53.005,5.025
ANALOG10: P1.11 U1.J3 | length 28.6
  Top Layer w0.102: U1.J3@41.2,20.3 v1(41.7,19.8)
  Bottom Layer w0.102: v1(41.7,19.8) 42.348,19.152 42.551,19.152 42.553,19.154 42.847,19.154 42.849,19.152 43.551,19.152 43.553,19.154 43.847,19.154 43.849,19.152 44.551,19.152 44.553,19.154 45.057,19.154 45.339,18.872 45.339,9.085 47.617,6.807 47.675,6.807 47.827,6.655 51.46,6.655 51.943,6.172 51.943,4.267 52.426,3.785 54.215,3.785 55.515,2.485 P1.11@55.545,2.485
ANALOG11: P1.12 U1.M3 | length 25.4
  Top Layer w0.102: U1.M3@44.2,20.3 v1(45.2,20.3)
  Bottom Layer w0.102: v1(45.2,20.3) 46.248,20.3 46.634,19.914 46.634,8.814 47.777,7.671 54.929,7.671 55.545,7.055 P1.12@55.545,5.025
ANALOG12: P1.13 U1.L3 | length 29.6
  Top Layer w0.102: U1.L3@43.2,20.3 v1(43.7,19.8)
  Bottom Layer w0.102: v1(43.7,19.8) 45.757,19.8 46.177,19.38 46.177,8.89 47.676,7.391 53.518,7.391 54.356,6.553 54.356,4.47 55.106,3.72 56.85,3.72 P1.13@58.085,2.485
ANALOG13: P1.14 U1.L4 | length 29.4
  Top Layer w0.102: U1.L4@43.2,21.3 43.725,20.775 46.6,20.775 46.838,20.537 v1(46.838,20.345)
  Bottom Layer w0.102: v1(46.838,20.345) 46.838,8.937 47.85,7.925 56.825,7.925 58.085,6.665 P1.14@58.085,5.025
AVDD: FB1.2 U1.G5 U1.H5 | length 2.7
  Top Layer w0.254: U1.G5@39.2,22.3 U1.H5@40.2,22.3 ; 39.7,22.3 v1(39.7,22.8)
  Bottom Layer w0.254: v1(39.7,22.8) 40.014,22.8 40.07,22.744 FB1.2@40.07,21.971
BE23_16: U1.A6 U4.A1 | length 39.6
  Top Layer w0.102: U4.A1@11.725,26.55 12.226,27.051 v1(12.649,27.051) ; v1(14.425,34.175) v1(27.075,34.175) ; v1@27.432,23.292 v1(27.432,30.378) ; v1@32.2,23.3 32.207,23.293 v1(32.207,23.165) 32.588,23.165 32.723,23.3 U1.A6@33.2,23.3
  Bottom Layer w0.102: v1(12.649,27.051) 12.598,27.102 13.03,27.102 13.15,27.222 13.15,33.775 13.55,34.175 v1(14.425,34.175) ; v1(27.075,34.175) 27.432,33.818 v1@27.432,30.36 ; v1(27.432,23.393) 27.661,23.165 v1(32.207,23.165)
BE31_24: U1.D5 U4.B2 | length 43.6
  Top Layer w0.102: U4.B2@10.975,25.8 v1(11.354,26.179) ; v1(15.2,33.692) v1(26.225,33.692) ; v1@26.775,30.404 26.775,23.034 27.009,22.8 v1(27.432,22.8) ; v1(35.7,22.8) U1.D5@36.2,22.3
  Bottom Layer w0.102: v1(11.354,26.179) 13.25,26.179 13.372,26.3 13.372,33.547 13.517,33.692 v1(15.2,33.692) ; v1(26.225,33.692) 26.558,33.692 26.775,33.475 v1@26.775,30.378 ; v1(27.432,22.8) v1(35.7,22.8)
  other v1: 26.772,30.404
EECLK: R23.2 U6.1 U7.2 | length 14.3
  Top Layer w0.203: U6.1@68.825,18.675 78.05,18.675 78.304,18.421 U7.2@78.304,15.041
  Top Layer w0.254: U7.2@78.304,15.041 78.304,14.046 78.35,14 v1(78.625,14)
EECS: R24.2 U6.48 U7.1 | length 15.2
  Top Layer w0.203: U6.48@67.475,17.325 67.475,17.975 67.7,18.2 77.25,18.2 77.654,17.796 U7.1@77.654,15.041
  Top Layer w0.254: v1(77.25,14) 77.575,14 77.654,14.079 U7.1@77.654,15.041
EEDATA: R25.1 U6.2 U7.3 | length 14.9
  Top Layer w0.203: U6.2@68.825,19.175 78.5,19.175 78.954,18.721 78.954,18.275 U7.3@78.954,15.041
  Bottom Layer w0.203: v1(78.95,18.3) R25.1@79.875,18.3
FB_ALE: R17.1 U1.A5 | length 42.9
  Top Layer w0.102: v1(27.432,16.002) v1(27.432,19.075) ; v1(32.2,22.3) U1.A5@33.2,22.3
  Bottom Layer w0.102: R17.1@19.875,19.544 19.875,18.936 20.383,18.936 20.383,18.707 19.367,18.707 19.367,18.479 20.383,18.479 20.383,18.25 19.367,18.25 19.367,18.021 20.383,18.021 20.383,17.793 19.367,17.793 19.367,17.564 20.383,17.564 20.383,17.335 19.367,17.335 19.367,17.107 20.383,17.107 20.383,16.878 19.367,16.878 19.367,16.65 20.383,16.65 20.383,16.421 19.367,16.421 19.367,16.192 20.383,16.192 20.383,15.964 19.418,15.964 19.38,15.926 19.38,15.824 19.406,15.799 27.229,15.799 v1(27.432,16.002) ; v1(27.432,19.075) 27.432,20.46 27.813,20.46 27.813,20.688 27.051,20.688 27.051,20.917 27.813,20.917 27.813,21.145 27.051,21.145 27.051,21.374 27.813,21.374 27.813,21.603 27.051,21.603 27.051,21.831 27.813,21.831 27.813,22.06 27.432,22.06 27.432,22.25 27.482,22.3 v1(32.2,22.3)
FB_CS0: R14.1 U1.D4 U4.B5 | length 46.3
  Top Layer w0.102: U4.B5@10.975,23.55 v1(11.35,23.175) ; v1(35.7,20.8) U1.D4@36.2,21.3
  Bottom Layer w0.102: v1(11.35,23.175) 11.831,22.694 11.831,21.819 11.946,21.704 13.171,21.704 13.275,21.6 13.275,18.682 13.783,18.682 13.783,18.453 12.767,18.453 12.767,18.224 13.783,18.224 13.783,17.996 12.767,17.996 12.767,17.767 13.783,17.767 13.783,17.539 12.767,17.539 12.767,17.31 13.783,17.31 13.783,17.081 12.767,17.081 12.767,16.853 13.275,16.853 13.275,15.579 13.411,15.443 34.036,15.443 34.2,15.607 34.2,19.849 34.519,20.168 35.068,20.168 v1(35.7,20.8) ; 13.275,19.425 R14.1@13.95,19.425
FB_OE: R16.1 U1.D11 U4.A2 | length 53.2
  Top Layer w0.102: U4.A2@11.725,25.8 12.109,25.8 12.268,25.959 v1(12.268,26.543) ; v1(13.65,34.658) 29.07,34.658 29.07,34.15 29.299,34.15 29.299,34.938 29.527,34.938 29.527,34.15 29.756,34.15 29.756,34.938 29.985,34.938 29.985,34.15 30.213,34.15 30.213,34.938 30.442,34.938 30.442,34.15 30.67,34.15 30.67,34.938 30.899,34.938 30.899,34.15 31.128,34.15 31.128,34.938 31.356,34.938 31.356,34.15 31.585,34.15 31.585,34.938 31.813,34.938 31.813,34.15 32.042,34.15 32.042,34.938 32.271,34.938 32.271,34.15 32.499,34.15 32.499,34.938 32.728,34.938 32.728,34.15 32.956,34.15 32.956,34.658 35.492,34.658 v1(35.725,34.425) ; v1(35.7,28.8) U1.D11@36.2,28.3
  Bottom Layer w0.102: v1(12.268,26.543) 12.275,27.877 ; R16.1@12.275,28.5 12.275,27.877 ; v1(13.65,34.658) 12.931,33.939 12.931,28.006 12.802,27.877 12.275,27.877 ; v1(35.7,28.8) 35.7,30.823 36.068,31.191 36.068,34.082 v1(35.725,34.425)
FB_RW: R15.1 U1.B7 U4.G5 | length 53.8
  Top Layer w0.102: U4.G5@7.225,23.55 6.85,23.175 6.85,15.731 6.934,15.646 7.353,15.646 7.353,15.392 7.582,15.392 7.582,15.9 7.81,15.9 7.81,15.392 8.039,15.392 8.039,15.9 8.268,15.9 8.268,15.392 8.496,15.392 8.496,15.9 8.725,15.9 8.725,15.392 8.954,15.392 8.954,15.9 9.182,15.9 9.182,15.392 9.411,15.392 9.411,15.9 9.639,15.9 9.639,15.392 9.868,15.392 9.868,15.9 10.096,15.9 10.096,15.392 10.325,15.392 10.325,15.9 10.554,15.9 10.554,15.392 10.782,15.392 10.782,15.9 11.011,15.9 11.011,15.392 11.239,15.392 11.239,15.646 27.737,15.646 27.9,15.81 v1@27.9,24.3 ; v1(33.7,23.8) U1.B7@34.2,24.3
  Bottom Layer w0.102: v1@27.889,24.3 32.698,24.3 33.198,23.8 v1(33.7,23.8)
  Bottom Layer w0.203: R15.1@5.975,21.125 v1(6.775,21.125)
  other v1: 27.889,24.308
FTM0_CH3: P3.2 U1.J7 | length 36.7
  Top Layer w0.102: U1.J7@41.2,24.3 v1(41.7,24.8) ; v1(47.925,25.975) 49.546,27.596 49.546,45.421 49.95,45.825 55.95,45.825 56.556,46.431 P3.2@56.556,48.185
  Bottom Layer w0.102: v1(41.7,24.8) 42.554,25.654 47.604,25.654 v1(47.925,25.975)
FTM0_CH4: P3.4 U1.J8 | length 33.6
  Top Layer w0.102: U1.J8@41.2,25.3 v1(41.7,25.8) ; v1(48.675,27.3) 49.342,27.967 49.342,45.642 49.975,46.275 53.725,46.275 54.016,46.566 P3.4@54.016,48.185
  Bottom Layer w0.102: v1(41.7,25.8) 41.757,25.857 47.232,25.857 v1(48.675,27.3)
FTM1_QDA: P3.6 U1.K8 | length 29.4
  Top Layer w0.102: U1.K8@42.2,25.3 42.7,24.8 45.637,24.8 49.139,28.302 49.139,45.848 P3.6@51.476,48.185
FTM1_QDB: P3.8 U1.L8 | length 26.8
  Top Layer w0.102: U1.L8@43.2,25.3 43.7,25.8 46.35,25.8 48.936,28.386 P3.8@48.936,48.185
FTM2_QDA: P3.10 U1.M9 | length 27.2
  Top Layer w0.102: U1.M9@44.2,26.3 46.562,26.3 48.728,28.466 48.728,45.647 48.525,45.85 46.625,45.85 46.396,46.079 P3.10@46.396,48.185
FTM3_CH1: P2.10 U1.E1 | length 17.9
  Top Layer w0.102: P2.10@31.161,5.025 31.161,6.675 31.236,6.75 34.875,6.75 36.2,8.075 36.2,16.82 37.2,17.82 U1.E1@37.2,18.3
FTM3_CH2: P2.11 U1.F4 | length 20.7
  Top Layer w0.102: P2.11@33.701,2.485 34.95,3.734 34.95,6.075 36.65,7.775 36.65,16.875 37.7,17.925 37.7,20.8 U1.F4@38.2,21.3
FTM3_CH3: P2.12 U1.F3 | length 19
  Top Layer w0.102: U1.F3@38.2,20.3 v1(38.7,19.8)
  Bottom Layer w0.102: P2.12@33.701,5.025 33.701,6.626 33.975,6.9 36.375,6.9 38.7,9.225 v1(38.7,19.8)
FTM3_CH4: LED2.4 P2.13 U1.F2 | length 18.7
  Top Layer w0.102: P2.13@36.241,2.485 37.475,3.719 37.475,11.625 ; LED2.4@38.165,11.626 37.476,11.626 37.475,11.625 ; U1.F2@38.2,19.3 38.7,18.8 38.7,17.675 37.475,16.45 37.475,11.625
FTM3_CH5: P2.14 U1.F1 | length 14.1
  Top Layer w0.102: P2.14@36.241,5.025 36.241,6.541 37.1,7.4 37.1,16.75 38.2,17.85 U1.F1@38.2,18.3
FTM3_CH6: LED2.1 P2.15 U1.G4 | length 21.3
  Top Layer w0.102: v1@38.175,7.45 LED2.1@38.175,8.314 ; U1.G4@39.2,21.3 v1(39.7,20.8)
  Bottom Layer w0.102: P2.15@38.781,2.485 37.475,3.791 37.475,6.8 39.167,8.492 39.167,19.787 39.7,20.32 v1(39.7,20.8)
  other v1: 38.175,7.5
FTM3_CH7: LED2.3 P2.16 U1.G3 | length 16.4
  Top Layer w0.102: U1.G3@39.2,20.3 v1(39.7,19.8) ; LED2.3@39.7,11.891 v1(39.7,12.475)
  Bottom Layer w0.102: P2.16@38.781,5.025 38.781,7.056 39.7,7.975 v1(39.7,12.475) v1(39.7,19.8)